# Altium PCB PC110.PcbDoc (part 4 of 24)
Units mm, origin at the board's own origin, x right, y up, seen from the top; angles counter-clockwise.
Board outline 150.05 x 107.35 mm, 10 copper layers (In2.Cu, F.Cu, B.Cu, In1.Cu, In3.Cu, In4.Cu, In5.Cu, In6.Cu, In7.Cu, In8.Cu); 936 components, 1434 nets, 4891 pads, 6088 vias.
Unrouted connection lines stored in the file: 2995.
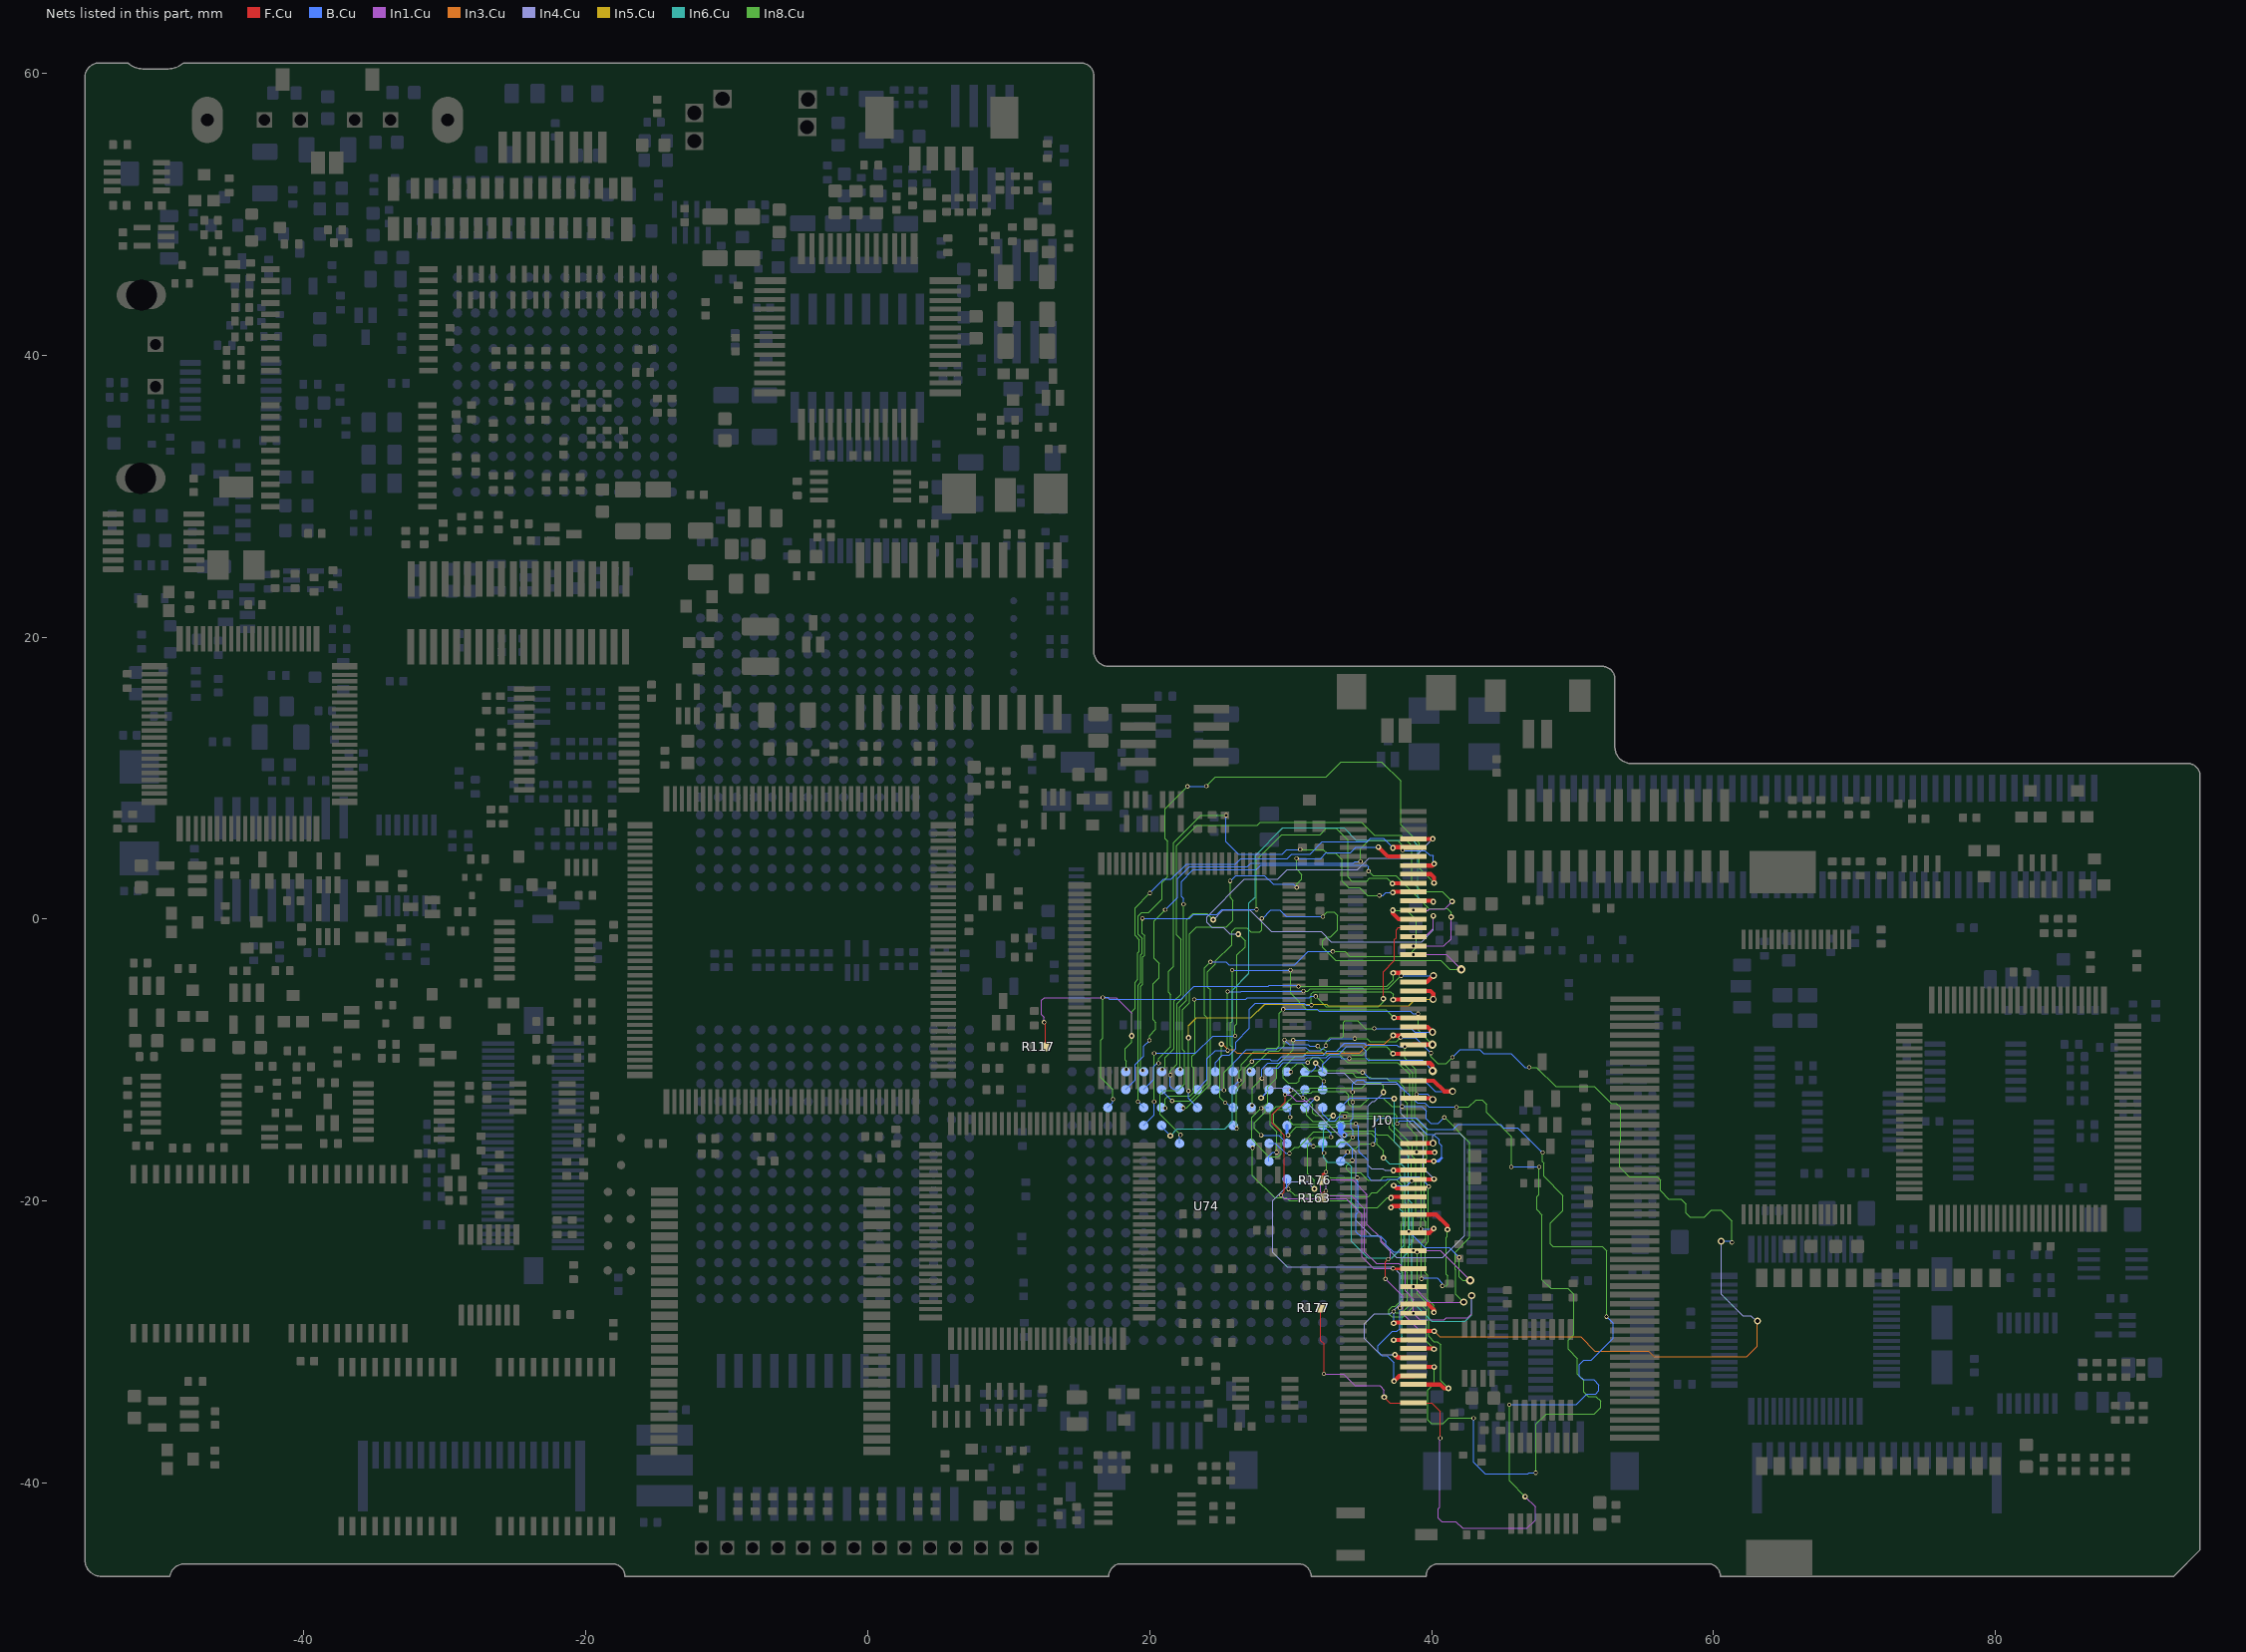
[diagram p12: the nets of this part, all layers, seen from the top]

## Footprints (in the part's own frame and the unit in brackets; to place one, negate y for a bottom-side part, rotate by r counter-clockwise, add the part's x,y. Pads: shape width x height; smd on the part's side, far side on the other; paste and mask are expansions set on the pad) (continued)
SSOP-28 [mm]
  rect 0.6x2.4 smd paste-2.4 mask+0: 1(-7.85,-5.25) 2(-6.6,-5.25) 3(-5.3,-5.25) 4(-4.05,-5.25) 5(-2.75,-5.25) 6(-1.5,-5.25) 7(-0.2,-5.25) 8(1.05,-5.25) 9(2.35,-5.25) 10(3.6,-5.25) 11(4.9,-5.25) 12(6.15,-5.25) 13(7.4,-5.25) 14(8.7,-5.25) 15(8.7,4.175) 16(7.45,4.175) 17(6.15,4.175) 18(4.9,4.175) 19(3.6,4.175) 20(2.35,4.175) 21(1.1,4.175) 22(-0.2,4.175) 23(-1.5,4.175) 24(-2.8,4.175) 25(-4.05,4.175) 26(-5.3,4.175) 27(-6.6,4.175) 28(-7.85,4.175)
  silkscreen extent -7.78,-3.48 -6.62,-2.32
Switch [mm]
  rect 1.1x1.1 hole 0.8 paste-2539.97 mask+0: 1(0.95,3.25) 2(0.95,0.25)
  rrect100% 3.5x2 hole 2.2 slot 0.8 at 90 deg paste-2539.97 mask+0: 3(-0.1,-6.25) 3(-0.05,6.75)
TestPoint_Pad_D1.5mm [mm]
  round 0.5 smd paste-0.5 mask+0: 1(0,0)
  silkscreen extent -0.95,-0.95 0.95,0.95
TSOP-5_1.65x3.05mm_P0.95mm [mm]
  rect 0.7x0.51 smd paste-0.7 mask+0: 1(1.16,-0.95) 2(1.16,0) 3(1.16,0.95) 4(-1.16,0.95) 5(-1.16,-0.95)
  silkscreen extent -0.8,-1.78 1.49,1.6
TSOT-23#1 [mm]
  rrect25% 1.22x0.65 smd paste-1.22 mask+0: 1(-1.31,0.95) 2(-1.31,-0.95) 3(1.31,0)
  silkscreen extent -2.2,-1.8 2.2,1.8
TSOT-23#2 [mm]
  rrect25% 1.22x0.65 smd paste-1.22 mask+0: 1(1.31,-0.95) 2(1.31,0.95) 3(-1.31,0)
  silkscreen extent -0.96,-1.88 1.52,1.58
TSOT-23#3 [mm]
  rect 0.7x1.4 smd paste-1.4 mask+0: 1(-0.65,0.9) 2(0,-1) 3(0.65,0.9)
TSSOP-14_4.4x5mm_P0.65mm#1 [mm]
  rrect25% 1.475x0.4 smd paste-1.475 mask+0: 1(-2.863,1.95) 2(-2.863,1.3) 3(-2.863,0.65) 4(-2.863,0) 5(-2.863,-0.65) 6(-2.863,-1.3) 7(-2.863,-1.95) 8(2.863,-1.95) 9(2.863,-1.3) 10(2.863,-0.65) 11(2.863,0) 12(2.863,0.65) 13(2.863,1.3) 14(2.863,1.95)
  silkscreen extent -3.14,-2.61 2.2,2.74
TSSOP-14_4.4x5mm_P0.65mm#2 [mm]
  rrect25% 1.475x0.4 smd paste-1.475 mask+0: 1(2.863,-1.95) 2(2.863,-1.3) 3(2.863,-0.65) 4(2.863,0) 5(2.863,0.65) 6(2.863,1.3) 7(2.863,1.95) 8(-2.863,1.95) 9(-2.863,1.3) 10(-2.863,0.65) 11(-2.863,0) 12(-2.863,-0.65) 13(-2.863,-1.3) 14(-2.863,-1.95)
  silkscreen extent -2.2,-2.74 3.14,2.61
TSSOP-16_4.4x5mm_P0.65mm [mm]
  rrect25% 1.475x0.4 smd paste-1.475 mask+0: 1(-2.863,2.275) 2(-2.863,1.625) 3(-2.863,0.975) 4(-2.863,0.325) 5(-2.863,-0.325) 6(-2.863,-0.975) 7(-2.863,-1.625) 8(-2.863,-2.275) 9(2.863,-2.275) 10(2.863,-1.625) 11(2.863,-0.975) 12(2.863,-0.325) 13(2.863,0.325) 14(2.863,0.975) 15(2.863,1.625) 16(2.863,2.275)
  silkscreen extent -4.19,-2.74 2.2,2.74
TSSOP-20_4.4x6.5mm_P0.65mm [mm]
  rrect25% 1.475x0.4 smd paste-1.475 mask+0: 1(2.863,-2.925) 2(2.863,-2.275) 3(2.863,-1.625) 4(2.863,-0.975) 5(2.863,-0.325) 6(2.863,0.325) 7(2.863,0.975) 8(2.863,1.625) 9(2.863,2.275) 10(2.863,2.925) 11(-2.863,2.925) 12(-2.863,2.275) 13(-2.863,1.625) 14(-2.863,0.975) 15(-2.863,0.325) 16(-2.863,-0.325) 17(-2.863,-0.975) 18(-2.863,-1.625) 19(-2.863,-2.275) 20(-2.863,-2.925)
  silkscreen extent -2.2,-3.38 4.19,3.38
TSSOP-24_6.1x7.8mm_P0.65mm [mm]
  rrect25% 1.475x0.4 smd paste-1.475 mask+0: 1(-3.712,3.575) 2(-3.712,2.925) 3(-3.712,2.275) 4(-3.712,1.625) 5(-3.712,0.975) 6(-3.712,0.325) 7(-3.712,-0.325) 8(-3.712,-0.975) 9(-3.712,-1.625) 10(-3.712,-2.275) 11(-3.712,-2.925) 12(-3.712,-3.575) 13(3.712,-3.575) 14(3.712,-2.925) 15(3.712,-2.275) 16(3.712,-1.625) 17(3.712,-0.975) 18(3.712,-0.325) 19(3.712,0.325) 20(3.712,0.975) 21(3.712,1.625) 22(3.712,2.275) 23(3.712,2.925) 24(3.712,3.575)
  silkscreen extent -5.04,-4.04 3.05,4.04
TSSOP-30_6.1x9.7mm_P0.65mm [mm]
  rrect25% 1.475x0.4 smd paste-1.475 mask+0: 1(3.712,-4.55) 2(3.712,-3.9) 3(3.712,-3.25) 4(3.712,-2.6) 5(3.712,-1.95) 6(3.712,-1.3) 7(3.712,-0.65) 8(3.712,0) 9(3.712,0.65) 10(3.712,1.3) 11(3.712,1.95) 12(3.712,2.6) 13(3.712,3.25) 14(3.712,3.9) 15(3.712,4.55) 16(-3.712,4.55) 17(-3.712,3.9) 18(-3.712,3.25) 19(-3.712,2.6) 20(-3.712,1.95) 21(-3.712,1.3) 22(-3.712,0.65) 23(-3.712,0) 24(-3.712,-0.65) 25(-3.712,-1.3) 26(-3.712,-1.95) 27(-3.712,-2.6) 28(-3.712,-3.25) 29(-3.712,-3.9) 30(-3.712,-4.55)
  silkscreen extent -3.05,-5.01 5.04,5.01
XTAL-1 [mm]
  rect 2.4x2.8 smd paste-2.8 mask+0: 1(-3.25,0.1) 2(3.25,0.1)
  rect 1.5x2.4 smd paste-2.4 mask-2.4: 3(0.05,0)
  F.Cu region: 4.05,1.8 1.7,1.8 1.7,-1.65 4.05,-1.65 4.05,-2.2 -4.05,-2.2 -4.05,-1.65 -1.7,-1.65 -1.7,1.8 -4.05,1.8 -4.05,2.4 4.05,2.4
XTAL-2 [mm]
  rect 1.5x2.1 smd paste-2.1 mask+0: 1(1.3,-5.55) 2(-1.25,-5.55)
  rect 2.4x1.5 smd paste-2.4 mask-2.4: 3(0.05,0)
  F.Cu region: 1.4,-3.45 1.2,-3.45 1.2,-4.15 0.2,-4.15 0.2,-6.5 -0.15,-6.5 -0.15,-4.15 -1.1,-4.15 -1.1,-3.5 -1.3,-3.5 -1.3,6.75 1.4,6.75
XTAL-3 [mm]
  rect 2x1.4 smd paste-2 mask+0: 1(-1.45,-2.75) 2(-1.45,2.75) 3(1.45,2.75) 4(1.45,-2.75)
  rect 2.4x1.5 smd paste-2.4 mask-2.4: 5(0,0)
  F.Cu region: -1.55,3.8 -0.1,3.8 -0.1,1.7 -1.5,1.7 -1.5,-1.7 -0.1,-1.7 -0.1,-3.8 -1.5,-3.8 -1.5,-3.95 1.55,-3.95 1.55,-3.8 0.1,-3.8 0.1,-1.7 1.5,-1.7 1.5,1.7 0.1,1.7 0.1,3.8 1.55,3.8 1.55,3.9 -1.55,3.9
XTAL-4 [mm]
  rect 4x1.5 smd paste-4 mask+0: 1(0.15,-2.2) 2(0.15,2.1) 3(0.15,-0.08)
XTAL-5 [mm]
  rect 1.5x2.4 smd paste-2.4 mask+0: 1(0,3.2) 2(0,-3.4)
  rect 1.5x2.4 smd paste-2.4 mask-2.4: 3(0,0)
  F.Cu region: 1.15,1.65 -1.15,1.65 -1.15,3.3 -1.3,3.3 -1.3,-3.5 -1.1,-3.5 -1.1,-1.85 1.1,-1.85 1.1,-3.5 1.3,-3.5 1.3,3.35 1.15,3.35
XTAL-6 [mm]
  rect 2.4x2.8 smd paste-2.8 mask+0: 1(3.25,-0.1) 2(-3.25,-0.1)
  rect 1.5x2.4 smd paste-2.4 mask-2.4: 3(-0.05,0)
  F.Cu region: -4.05,1.65 -1.7,1.65 -1.7,-1.8 -1.725,-1.8 -1.725,-2.4 1.7,-2.4 1.7,-1.8 1.7,1.65 4.05,1.65 4.05,2.2 -4.05,2.2

## Part data
C1 C2 C3 C4 C5 C6 C7 C8 C15 C16 C17 C19 C20 C24 C26 C27 C28 C29 C31 C32 C33 C34 C35 C37 C38 C39 C40 C41 C42 C43 C44 C48 C50 C52 C53 C55 C56 C58 C61 C62 C64 C65 C67 C68 C69 C70 C71 C72 C73 C74 C75 C76 C77 C78 C81 C82 C83 C84 C85 C86 C87 C88 C90 C91 C92 C93 C94 C95 C96 C97 C98 C99 C101 C102 C103 C104 C105 C106 C107 C108 C109 C110 C111 C112 C113 C114 C115 C116 C117 C119 C120 C121 C122 C123 C125 C126 C127 C128 C129 C133 C136 C137 C138 C139 C141 C142 C143 C144 C145 C146 C148 C149 C151 C154 C155 C156 C157 C159 C163 C165 C167 C169 C170 C171 C172 C173 C174 C175 C177 C178 C179 C180 C181 C182 C183 C184 C185 C186 C187 C188 C189 C191 C192 C193 C194 C195 C196 C198 C199 C203 C205 C208 C211 C212 C213 C215 C216 C217 C219 C220 C223 C227 C228 C230 C231 C234 C235 C236 C237 C239 C241 C242 C243 C244 C247 C249 C250 C251 C252 C253 C254 C255 C256 C257 C258 C260 C261 C263 C264 C265 C266 C267 C268 C269 C270 C271 C272 C274 C275 C276 C278 C279 C280 C281 C282 C283: library part C_0402_1005Metric, "Capacitor SMD 0402 (1005 Metric), square (rectangular) end terminal, IPC_7351 nominal, (Body size source: IPC-SM-782 page 76, https://www.pcb-3d.com/wordpress/wp-content/uploads/ipc-sm-782a_amendment_1_and_2.pdf), generated with kicad-footprint-generator"
  C6 C8 C16 C19 C27 C28 C35 C44 C50 C52 C53 C55 C56 C58 C61 C62 C68 C69 C70 C71 C74 C76 C78 C82 C94 C96 C97 C98 C99 C102 C103 C104 C105 C106 C107 C111 C112 C114 C115 C116 C117 C119 C121 C122 C123 C125 C127 C128 C133 C137 C138 C139 C141 C142 C143 C144 C145 C146 C148 C149 C151 C155 C157 C159 C165 C203 C205 C208 C211 C212 C213 C215 C216 C217 C219 C220 C223 C231 C236 C241 C244 C247 C250 C251 C252 C253 C255 C263 C266 C267 C269 C271 C274 C275 C276 C280: ki_fp_filters=C_*
  C270: ki_fp_filters=R_*
C9 C10 C14 C23 C30 C36 C47 C51 C152 C160 C161 C162 C200 C201 C204 C206 C209 C210 C214 C232: library part C_1206_3216Metric, "Capacitor SMD 1206 (3216 Metric), square (rectangular) end terminal, IPC_7351 nominal, (Body size source: IPC-SM-782 page 76, https://www.pcb-3d.com/wordpress/wp-content/uploads/ipc-sm-782a_amendment_1_and_2.pdf), generated with kicad-footprint-generator"
  C9 C14 C152 C161 C204 C209 C214: ki_fp_filters=C_*
C11 C12 C13 C18 C21 C22 C25 C45 C46 C57 C59 C60 C63 C66 C79 C80 C89 C100 C124 C130 C131 C132 C134 C140 C147 C150 C153 C158 C164 C166 C168 C176 C190 C197 C202 C207 C218 C221 C222 C224 C225 C226 C229 C233 C238 C240 C245 C246 C248 C259 C273 C277: library part C_0603_1608Metric, "Capacitor SMD 0603 (1608 Metric), square (rectangular) end terminal, IPC_7351 nominal, (Body size source: IPC-SM-782 page 76, https://www.pcb-3d.com/wordpress/wp-content/uploads/ipc-sm-782a_amendment_1_and_2.pdf), generated with kicad-footprint-generator"
  C57 C59 C60 C63 C66 C79 C80 C100 C130 C131 C132 C134 C140 C153 C158 C164 C248 C277: ki_fp_filters=C_*
C49 C54 C118 C135 C262: library part C_0805_2012Metric, "Capacitor SMD 0805 (2012 Metric), square (rectangular) end terminal, IPC_7351 nominal, (Body size source: IPC-SM-782 page 76, https://www.pcb-3d.com/wordpress/wp-content/uploads/ipc-sm-782a_amendment_1_and_2.pdf, https://docs.google.com/spreadsheets/d/1BsfQQcO9C6DZCsRaXUlFlo91Tg2WpOkGARC1WS5S8t0/edit?usp=sharing), generated with kicad-footprint-generator"
  C54 C262: ki_fp_filters=C_*
D1 D3 D5 D6 D7 D8 D9 D11 D12 D16 D18 D21 D22 D24 D25 D26 D27 D28 D29 D34 D35 Q8 Q17: library part 3D
  D6 D7: ki_fp_filters="TO-???* *_Diode_* *SingleDiode* D_*"
D2 D4 D10 D13 D14 D15 D17 D19 D20 D30 D31 D32 D37 D40 D42 D43 D45 D46 D49 D58 D59 Q4 Q5 Q6 Q22: library part SOT-416L
D23 D36 D38 D41 D44 D47 D48 D50 D51: library part D_0603_1608Metric, "Diode SMD 0603 (1608 Metric), square (rectangular) end terminal, IPC_7351 nominal, (Body size source: http://www.tortai-tech.com/upload/download/2011102023233369053.pdf), generated with kicad-footprint-generator", ki_fp_filters="TO-???* *_Diode_* *SingleDiode* D_*"
D33 D52 D53 D54 D56 D57 Q2 Q7 Q10 Q12 Q14 Q15 Q18 Q19 Q21 Q23 Q26 Q27 Q28 Q30 Q32 Q38: library part SOT-416, "SOT-416, https://www.nxp.com/docs/en/package-information/SOT416.pdf"
  D52 D53 D54 D56 D57: ki_fp_filters=SOT?323*
  Q2 Q7 Q10 Q12 Q14 Q18 Q19 Q26 Q27 Q38: ki_fp_filters=SOT?23*
D39 D55: library part Diode, ki_fp_filters="TO-???* *_Diode_* *SingleDiode* D_*"
D60: library part SOT-23, "SOT, 3 Pin (JEDEC TO-236 Var AB https://www.jedec.org/document_search?search_api_views_fulltext=TO-236), generated with kicad-footprint-generator ipc_gullwing_generator.py"
EM1 EM2 EM3 EM4 EM5 RA1 RA2 RA3 RA4 RA5: library part R-array
  RA1 RA2 RA3 RA4 RA5: ki_fp_filters="DIP* SOIC* R*Array*Concave* R*Array*Convex* MSOP*"
F1 F2 F3 F4: library part Fuse_1206_3216Metric, "Fuse SMD 1206 (3216 Metric), square (rectangular) end terminal, IPC_7351 nominal, (Body size source: http://www.tortai-tech.com/upload/download/2011102023233369053.pdf), generated with kicad-footprint-generator", ki_fp_filters=*Fuse*
G1: library part logo
J1: library part PS2
J2: library part LCD_connector, ki_fp_filters=Connector*:*_1x??_*
J3: library part Audio-Jack, ki_fp_filters=Jack*
J4: library part connector-4, ki_fp_filters=Connector*:*_1x??_*
J5: library part PSU_Connector, ki_fp_filters=Connector*:*_2x??_*
J6: library part BridgeBatt, ki_fp_filters=Connector*:*_1x??_*
J7: library part SPKR, ki_fp_filters=Connector*:*_1x??_*
J8: library part Modem-Connector
J9: library part Debug-10
J10: library part PCMCIA
J11: library part CF-card
J12: library part Debug-6
J13: library part "Docking Port"
J14: library part TestPoint_Pad_D1.5mm, "SMD pad as test Point, diameter 1.5mm"
J15: library part "RAM Module"
J16: library part Flat-20, ki_fp_filters=Connector*:*_1x??_*
J17: library part Flat-8, ki_fp_filters=Connector*:*_1x??_*
J18: library part Flat-4, ki_fp_filters=Connector*:*_1x??_*
J19: library part Flat-18, ki_fp_filters=Connector*:*_1x??_*
L1 L2 L3 L5 L6 L7 L8 L11 L13 L14 L15 L16 L17 L18: library part L_0603_1608Metric, "Inductor SMD 0603 (1608 Metric), square (rectangular) end terminal, IPC_7351 nominal, (Body size source: http://www.tortai-tech.com/upload/download/2011102023233369053.pdf), generated with kicad-footprint-generator"
  L1: ki_fp_filters="Choke_* *Coil* Inductor_* L_*"
L4: library part L_1210_3225Metric, "Inductor SMD 1210 (3225 Metric), square (rectangular) end terminal, IPC_7351 nominal, (Body size source: http://www.tortai-tech.com/upload/download/2011102023233369053.pdf), Alternate KiCad Library", ki_fp_filters="Choke_* *Coil* Inductor_* L_*"
L9 L10 L12: library part L_0805_2012Metric, "Inductor SMD 0805 (2012 Metric), square (rectangular) end terminal, IPC_7351 nominal, (Body size source: IPC-SM-782 page 80, https://www.pcb-3d.com/wordpress/wp-content/uploads/ipc-sm-782a_amendment_1_and_2.pdf), generated with kicad-footprint-generator"
  L12: ki_fp_filters="Choke_* *Coil* Inductor_* L_*"
Q1 Q11 Q13 Q24 Q29 Q31: library part SOT-23, "SOT-23, Standard, Alternate KiCad Library"
  Q11 Q13: ki_fp_filters=SOT?23*
  Q24 Q31: ki_fp_filters="SOT?23* SC?59*"
  Q29: ki_fp_filters="SOT* SC*"
Q3 Q25 Q33 Q34 Q37: library part SOT-89-3, "SOT-89-3, http://ww1.microchip.com/downloads/en/DeviceDoc/3L_SOT-89_MB_C04-029C.pdf"
  Q3: ki_fp_filters=TO?92*
Q9 Q35 Q43 Q44: library part SOT-523, "SOT523, https://www.diodes.com/assets/Package-Files/SOT523.pdf", ki_fp_filters=SOT?23*
Q16: library part TSOT-23, "3-pin TSOT23 package, http://www.analog.com.tw/pdf/All_In_One.pdf, Alternate KiCad Library"
Q20 Q36: library part TSOT-23, "3-pin TSOT23 package, http://www.analog.com.tw/pdf/All_In_One.pdf"
Q39 Q40 Q41 Q42: library part TSOT-23
R1 R2 R3 R4 R5 R6 R7 R8 R9 R10 R11 R12 R13 R14 R15 R16 R17 R18 R19 R20 R21 R22 R23 R24 R25 R26 R27 R29 R30 R31 R32 R33 R34 R35 R36 R37 R38 R39 R40 R41 R42 R43 R44 R45 R46 R47 R48 R49 R50 R51 R52 R53 R54 R55 R56 R57 R58 R59 R60 R61 R62 R63 R64 R65 R66 R67 R69 R70 R71 R72 R73 R74 R75 R76 R77 R78 R79 R80 R81 R82 R83 R84 R85 R86 R87 R88 R89 R90 R91 R92 R93 R94 R95 R96 R97 R98 R99 R100 R101 R102 R103 R104 R105 R106 R107 R108 R109 R110 R112 R113 R114 R115 R116 R117 R118 R119 R120 R121 R122 R123 R124 R125 R126 R127 R128 R129 R130 R131 R132 R133 R134 R135 R136 R137 R138 R139 R140 R141 R142 R143 R144 R145 R146 R147 R148 R149 R150 R151 R152 R153 R154 R155 R156 R157 R158 R159 R160 R161 R162 R163 R164 R165 R166 R167 R168 R169 R170 R171 R172 R173 R174 R175 R176 R177 R178 R179 R180 R181 R182 R183 R184 R185 R186 R187 R188 R189 R190 R191 R192 R193 R194 R195 R196 R197 R198 R199 R200 R201 R202 R203 R204 R205 R206 R207 R208 R209 R210 R211 R212 R213 R214 R215 R216 R217 R218 R219 R220 R221 R222 R223 R224 R225 R227 R228 R229 R232 R233 R234 R235 R236 R237 R240 R242 R252 R253 R255 R258 R259 R260 R261 R262 R263 R265 R266 R268 R269 R270 R271 R272 R274 R275 R276 R277 R278 R279 R280 R281 R282 R283 R285 R286 R287 R288 R314 R316 R317 R318 R319 R320 R321 R322 R323 R324 R326 R327 R328 R329 R330 R331 R332 R333 R334 R335 R336 R337 R338 R339 R340 R341 R342 R343 R344 R345 R346 R347 R348 R349 R350 R351 R352 R353 R354 R355 R356 R357 R358 R359 R400 R401 R402 R403 R404 R405 R406: library part R_0402_1005Metric, "Resistor SMD 0402 (1005 Metric), square (rectangular) end terminal, IPC_7351 nominal, (Body size source: IPC-SM-782 page 72, https://www.pcb-3d.com/wordpress/wp-content/uploads/ipc-sm-782a_amendment_1_and_2.pdf), Alternate KiCad Library", ki_fp_filters=R_*
  R70: Description="External clock input for Audio Drive"
R28 R226: library part R_1206_3216Metric, "Resistor SMD 1206 (3216 Metric), square (rectangular) end terminal, IPC_7351 nominal, (Body size source: IPC-SM-782 page 72, https://www.pcb-3d.com/wordpress/wp-content/uploads/ipc-sm-782a_amendment_1_and_2.pdf), Alternate KiCad Library", ki_fp_filters=R_*
R68 R292 R300 R313: library part R_0805_2012Metric, "Resistor SMD 0805 (2012 Metric), square (rectangular) end terminal, IPC_7351 nominal, (Body size source: IPC-SM-782 page 72, https://www.pcb-3d.com/wordpress/wp-content/uploads/ipc-sm-782a_amendment_1_and_2.pdf), generated with kicad-footprint-generator", ki_fp_filters=R_*
R111 R231 R239: library part R_0603_1608Metric, "Resistor SMD 0603 (1608 Metric), square (rectangular) end terminal, IPC_7351 nominal, (Body size source: IPC-SM-782 page 72, https://www.pcb-3d.com/wordpress/wp-content/uploads/ipc-sm-782a_amendment_1_and_2.pdf), Alternate KiCad Library", ki_fp_filters=R_*
R230 R250 R256 R264 R267 R273 R284: library part R_0805_2012Metric, "Resistor SMD 0805 (2012 Metric), square (rectangular) end terminal, IPC_7351 nominal, (Body size source: IPC-SM-782 page 72, https://www.pcb-3d.com/wordpress/wp-content/uploads/ipc-sm-782a_amendment_1_and_2.pdf), Alternate KiCad Library", ki_fp_filters=R_*
R238: library part R_0603_1608Metric, "Resistor SMD 0603 (1608 Metric), square (rectangular) end terminal, IPC_7351 nominal, (Body size source: IPC-SM-782 page 72, https://www.pcb-3d.com/wordpress/wp-content/uploads/ipc-sm-782a_amendment_1_and_2.pdf), generated with kicad-footprint-generator", ki_fp_filters=R_*
R241: library part R_1206_3216Metric_Pad1.30x1.75mm_HandSolder, "Resistor SMD 1206 (3216 Metric), square (rectangular) end terminal, IPC_7351 nominal with elongated pad for handsoldering. (Body size source: IPC-SM-782 page 72, https://www.pcb-3d.com/wordpress/wp-content/uploads/ipc-sm-782a_amendment_1_and_2.pdf), generated with kicad-footprint-generator", ki_fp_filters=R_*
R243 R244 R245 R246 R247 R248 R249 R251 R254 R257 R289 R290 R291 R293 R294 R295 R296 R297 R298 R299 R301 R302 R303 R304 R305 R306 R307 R308 R309 R310 R311 R312 R315 R325 R360 R361 R362 R363 R364 R365 R366 R367 R368 R369 R370 R371 R372 R373 R374 R375 R376 R377 R378 R379 R380 R381 R382 R383 R384 R385 R386 R387 R388 R389 R390 R391 R392 R393 R394 R395 R396 R397 R398 R399 R407 R408 R409 R410 R411 R412 R413: library part R_0402_1005Metric, "Resistor SMD 0402 (1005 Metric), square (rectangular) end terminal, IPC_7351 nominal, (Body size source: IPC-SM-782 page 72, https://www.pcb-3d.com/wordpress/wp-content/uploads/ipc-sm-782a_amendment_1_and_2.pdf), generated with kicad-footprint-generator", ki_fp_filters=R_*
SW1: library part Switch
SW2: library part LidSwitch
U1 U9 U14 U15 U23 U24 U25 U29 U37 U52 U58 U60 U65: library part SOT-353, "SOT-353, SC-70-5"
  U1 U14 U15 U23 U52 U58: ki_fp_filters="SOT?23* SOT?553*"
  U9 U25 U37 U65: ki_fp_filters="SOT* SG-*"
  U24 U60: ki_fp_filters="SOT?23* Texas?R-PDSO-G5?DCK* Texas?R-PDSO-N5?DRL* Texas?X2SON*0.8x0.8mm*P0.48mm*"
  U29: ki_fp_filters=SOT?23*
U2 U19 U20 U26 U38 U39: library part sso-8
  U2 U20 U26 U38 U39: ki_fp_filters="SSOP* VSSOP*"
  U19: ki_fp_filters=VSSOP*
U3: library part IRDA
U4: library part QFN-52
U5 U18 U30 U32 U34 U40 U54 U56 U57 U62 U64 U66 U68 U71: library part TSSOP-14_4.4x5mm_P0.65mm, "TSSOP, 14 Pin (JEDEC MO-153 Var AB-1 https://www.jedec.org/document_search?search_api_views_fulltext=MO-153), generated with kicad-footprint-generator ipc_gullwing_generator.py"
  U5 U18 U30 U32 U34 U40 U68: ki_fp_filters=DIP*W7.62mm*
  U54: Datasheet=https://github.com/ahmadexp/PC110-Mainboard-Schematic/blob/main/datasheets/bottom/b-v74.pdf, Description="Dual D-Type Positive-Edge-Triggered Flip-Flops With Clear and Preset", ki_fp_filters=DIP*W7.62mm*
  U56: ki_fp_filters=DIP?14*
  U57 U62: Datasheet=https://github.com/ahmadexp/PC110-Mainboard-Schematic/blob/main/datasheets/bottom/a%26e-V125.pdf, Description="ABT QUADRUPLE BUS BUFFER WITH 3STATE OUTPUTS", ki_fp_filters=DIP*W7.62mm*
  U64: Datasheet=https://github.com/ahmadexp/PC110-Mainboard-Schematic/blob/main/datasheets/bottom/g-V126.pdf, Description="Quadruple Bus Buffer Gates With 3-State Outputs", ki_fp_filters=DIP*W7.62mm*
  U66: Datasheet=https://github.com/ahmadexp/PC110-Mainboard-Schematic/blob/main/datasheets/bottom/f-V02.pdf, Description="Quadruple 2-Input Positive-NOR Gates", ki_fp_filters="SO14* DIP*W7.62mm*"
  U71: Datasheet=https://github.com/ahmadexp/PC110-Mainboard-Schematic/blob/main/datasheets/bottom/d-V32.pdf, Description="Quadruple 2-Input Positive-Or Gates", ki_fp_filters=DIP?14*
U6: library part QFN-80
U7: library part TSSOP-24_6.1x7.8mm_P0.65mm, "TSSOP, 24 Pin (JEDEC MO-153 Var DA https://www.jedec.org/document_search?search_api_views_fulltext=MO-153), generated with kicad-footprint-generator ipc_gullwing_generator.py"
U8: library part GRAMchip
U10: library part SOP-24
U11 U44: library part soic-8-small, ki_fp_filters="SOIC*3.9x4.9mm*P1.27mm* DIP*W7.62mm* TO*99* OnSemi*Micro8* TSSOP*3x3mm*P0.65mm* TSSOP*4.4x3mm*P0.65mm* MSOP*3x3mm*P0.65mm* SSOP*3.9x4.9mm*P0.635mm* LFCSP*2x2mm*P0.5mm* *SIP* SOIC*5.3x6.2mm*P1.27mm*"
U12: library part SOIC-8-narrow, Datasheet=https://github.com/ahmadexp/Open-Source-PC110/blob/main/datasheets/top/6-LM4861.pdf, Description="Audio Amp", ki_fp_filters="MSOP*3x3mm*P0.65mm* SOIC*3.9x4.9mm*P1.27mm*"
U13 U16 U17 U31 U50: library part SOT-23-5, "SOT, 5 Pin (JEDEC MO-178 Var AA https://www.jedec.org/document_search?search_api_views_fulltext=MO-178), generated with kicad-footprint-generator ipc_gullwing_generator.py"
U21: library part Bowman
U22: library part FDC
U27: library part Flash-32
U28 U33: library part RAMchip
U35: library part Pluto
U36: library part SOP48
U41: library part SanDisk
U42: library part QFN-100
U43: library part LCD, ki_fp_filters=Connector*:*_1x??_*
U45: library part TSSOP-16_4.4x5mm_P0.65mm, "TSSOP, 16 Pin (https://www.jedec.org/document_search?search_api_views_fulltext=MO-153), generated with kicad-footprint-generator ipc_gullwing_generator.py", ki_fp_filters=DIP?16*
U46: library part SOP-16, "SOP, 16 Pin (https://toshiba.semicon-storage.com/info/docget.jsp?did=12855&prodName=TLP290-4), generated with kicad-footprint-generator ipc_gullwing_generator.py"
U47 U48: library part SOIC-8, "SOIC, 8 Pin (JEDEC MS-012AA, https://www.analog.com/media/en/package-pcb-resources/package/pkg_pdf/soic_narrow-r/r_8.pdf), generated with kicad-footprint-generator ipc_gullwing_generator.py"
  U47: ki_fp_filters="SOIC*3.9x4.9mm*P1.27mm* DIP*W7.62mm* MSOP*3x3mm*P0.65mm* SSOP*2.95x2.8mm*P0.65mm* TSSOP*3x3mm*P0.65mm* VSSOP*P0.5mm* TO?99*"
  U48: Description="Digital Rheostat"
U49 U72: library part SSOP-24_5.3x8.2mm_P0.65mm, "24-Lead Plastic Shrink Small Outline (SS)-5.30 mm Body [SSOP] (see Microchip Packaging Specification 00000049BS.pdf)", Datasheet=https://github.com/ahmadexp/PC110-Mainboard-Schematic/blob/main/datasheets/bottom/8-HD151015.pdf, Description="9 bit Level Shifter/Transceiver With 3 State Outputs"
U51: library part BGA-169
U53 U55: library part TSOP-5_1.65x3.05mm_P0.95mm, "TSOP-5 package (comparable to TSOT-23), https://www.vishay.com/docs/71200/71200.pdf"
U59: library part Flash-40
U61 U74 U76: library part BGA-256
  U76: Datasheet=http://github.com/ahmadexp/PC110-Mainboard-Schematic/blob/main/datasheets/bottom/4-486SX-33.pdf, Description="Intel 486 SX"
U63: library part SOIC-16W, "SOIC, 16 Pin (http://www.ti.com/lit/ml/msop002a/msop002a.pdf), generated with kicad-footprint-generator ipc_gullwing_generator.py"
U67: library part QFN64, Description="Keyboard controller"
U69: library part SSOP-8_2.95x2.8mm_P0.65mm, "SSOP-8 2.9 x2.8mm Pitch 0.65mm", Datasheet=https://github.com/ahmadexp/PC110-Mainboard-Schematic/blob/main/datasheets/bottom/h-7W32.pdf, Description="Dual 2-Input Positive-OR Gate", ki_fp_filters="SSOP* VSSOP*"
U70: library part TSSOP-30_6.1x9.7mm_P0.65mm, "TSSOP, 30 Pin (JEDEC MO-153 Var DB-1 https://www.jedec.org/document_search?search_api_views_fulltext=MO-153), generated with kicad-footprint-generator ipc_gullwing_generator.py", Datasheet=https://github.com/ahmadexp/PC110-Mainboard-Schematic/blob/main/datasheets/bottom/12-TPS2201.PDF, Description="Dual-Slot PC Card Power-Interface Switches"
U73: library part TSSOP-20_4.4x6.5mm_P0.65mm, "TSSOP, 20 Pin (JEDEC MO-153 Var AC https://www.jedec.org/document_search?search_api_views_fulltext=MO-153), generated with kicad-footprint-generator ipc_gullwing_generator.py", Datasheet=https://github.com/ahmadexp/PC110-Mainboard-Schematic/blob/main/datasheets/bottom/c-V244.pdf, Description="ABT OCTAL BUFFER/DRIVER", ki_fp_filters=DIP?20*
U75: library part SSOP-28, Description="Trackpad Controller"
X1: library part XTAL-2
X2: library part XTAL-1, ki_fp_filters=Crystal*
X3: library part XTAL-3, ki_fp_filters=Crystal*
X4: library part XTAL-6, ki_fp_filters=Crystal*
X5: library part XTAL-5, ki_fp_filters=Crystal*
X6: library part XTAL-4, ki_fp_filters=Crystal*

## Via types
v1: diameter 0.3, hole 0.2, B.Cu to In8.Cu, tented both sides, 1934 vias
v2: diameter 0.4, hole 0.2, F.Cu to B.Cu, tented both sides, 1902 vias
v3: diameter 0.3, hole 0.2, F.Cu to In1.Cu, tented both sides, 1729 vias
v4: diameter 0.6, hole 0.3, F.Cu to B.Cu, tented both sides, 354 vias
v5: diameter 0.5, hole 0.3, F.Cu to B.Cu, tented both sides, 136 vias
v6: diameter 0.4, hole 0.2, B.Cu to In8.Cu, tented both sides, 12 vias
v7: diameter 0.3, hole 0.2, F.Cu to B.Cu, tented both sides, 6 vias
v8: diameter 0.6, hole 0.2, F.Cu to B.Cu, tented both sides, 4 vias
v9: diameter 0.5, hole 0.2, B.Cu to In8.Cu, tented both sides, 3 vias
v10: diameter 0.5, hole 0.2, F.Cu to B.Cu, tented both sides, 2 vias
v11: diameter 0.4, hole 0.3, F.Cu to B.Cu, tented both sides, 2 vias
v12: diameter 0.3, hole 0.2, F.Cu to In4.Cu, tented both sides, 2 vias
v13: diameter 0.6, hole 0.3, B.Cu to In8.Cu, tented both sides, 1 vias
v14: diameter 0.3, hole 0.2, F.Cu to In3.Cu, tented both sides, 1 vias

## Nets (pads, with @x,y where several pads share a name; then routed paths per layer and width w, separated by ;. In a path a pad name is that pad's centre, name@x,y a point inside that pad or via, vN(x,y) a via of type N, cw(c..) or ccw(c..) an arc to the next point about the centre after c; other vN are vias at no path point)
A5VDET: J10.19 U74.P3 | length 31.6
  F.Cu w0.3: v2(37.27,-3.81) 37.28,-3.8 J10.19@38.7,-3.8
  In8.Cu w0.08: v1(16.67,-5.55) 16.68,-5.56 16.68,-8.42 16.53,-8.57 16.53,-11.22 17.39,-12.08 v1(17.39,-12.77) ; v1(30.56,-4.78) 30.59,-4.75 36.81,-4.75 37.27,-4.29 v2(37.27,-3.81)
  B.Cu w0.08: v1(16.67,-5.55) 17.03,-5.55 17.15,-5.67 22.23,-5.67 23.14,-4.76 28.42,-4.76 28.48,-4.7 30.48,-4.7 v1(30.56,-4.78) ; U74.P3@17.03,-13.37 17.03,-13.34 17.38,-12.99 17.38,-12.78 v1(17.39,-12.77)
ABVD1: J10.59 R163.2 U74.M13 | length 105.6
  F.Cu w0.08: v3(36.72,-25.51) 36.72,-24.3 v3(36.91,-24.11)
  F.Cu w0.2: R163.2@32.21,-19.77 32.21,-19.56 32.49,-19.28 v3(32.5,-19.28)
  F.Cu w0.3: J10.59@38.7,-29.2 40.16,-29.2 v2(40.18,-29.22)
  In1.Cu w0.08: v3(32.5,-19.28) 32.5,-18.67 32.68,-18.49 34.39,-18.49 35.43,-19.53 35.43,-21.64 36.43,-22.64 36.43,-22.81 37.08,-23.46 37.08,-23.94 v3(36.91,-24.11) ; v3(36.72,-25.51) 37.96,-26.75 37.96,-27.97 39.21,-29.22 v2(40.18,-29.22)
  In3.Cu w0.08: v2(40.18,-29.22) 40.58,-29.62 50.57,-29.62 51.57,-30.62 55.38,-30.62 55.78,-31.02 62.36,-31.02 63.11,-30.27 v5(63.11,-28.49)
  In4.Cu w0.08: v5(60.54,-22.84) 60.54,-26.61 62.06,-28.13 62.65,-28.13 63.01,-28.49 v5(63.11,-28.49)
  In8.Cu w0.08: v1(27.91,-15.32) 27.44,-14.85 27.44,-14.44 28.2,-13.68 28.2,-13.2 28.36,-13.04 28.36,-11.89 29,-11.25 29,-10.41 30.18,-9.23 v1(30.18,-8.57) ; v1(34.54,-8.47) 35.4,-8.47 35.62,-8.69 37.49,-8.69 v1(37.79,-8.39) ; v1(39.95,-9.49) 39.95,-9.74 40.44,-10.23 41.04,-10.23 v1(41.48,-9.79) ; v1(46.92,-10.51) 47.43,-10.51 48.8,-11.88 51.55,-11.88 52.72,-13.05 53.09,-13.05 53.4,-13.36 53.4,-15.77 53.34,-15.83 53.34,-17.58 54.01,-18.25 55.98,-18.25 56.235,-18.505 56.235,-19.265 56.82,-19.85 57.7,-19.85 58.05,-20.2 58.05,-20.85 58.32,-21.12 59.36,-21.12 59.85,-20.63 60.53,-20.63 61.3,-21.4 v1(61.3,-22.93)
  B.Cu w0.08: v1(27.91,-15.32) 29.17,-15.32 U74.M13@29.73,-15.88 ; v1(30.18,-8.57) 31.2,-8.57 31.25,-8.62 32.71,-8.62 32.86,-8.47 v1(34.54,-8.47) ; v1(37.79,-8.39) 38.85,-8.39 v1(39.95,-9.49) ; v1(41.48,-9.79) 42.04,-9.23 43.34,-9.23 43.37,-9.26 43.41,-9.26 43.69,-9.54 45.64,-9.54 46.61,-10.51 v1(46.92,-10.51) ; v5(60.54,-22.84) 61.21,-22.84 v1(61.3,-22.93)
ABVD2: J10.57 R176.2 U74.P16 | length 46.8
  F.Cu w0.2: R176.2@32.23,-18.51 32.23,-18.19 v3(32.5,-17.92)
  In1.Cu w0.08: v3(32.5,-17.92) 32.5,-18.05 32.13,-18.42 32.13,-19.35 32.38,-19.6 34.3,-19.6 35.25,-20.55 35.25,-23.59 36.09,-24.43 37.69,-24.43 38.12,-24.86 38.12,-26.37 38.7,-26.95 v3(38.7,-27.95) 39.15,-28.4 40.88,-28.4 41.02,-28.26 42.57,-28.26 42.84,-27.99 v5(42.84,-26.7)
  In6.Cu w0.08: v2(37.34,-12.73) 37.34,-15.78 38.36,-16.8 38.36,-19.89 38.6,-20.13 38.6,-27.1 40,-28.5 42.39,-28.5 42.83,-28.06 42.83,-26.71 v5(42.84,-26.7)
  B.Cu w0.08: U74.P16@33.54,-13.34 34.2,-12.68 37.29,-12.68 v2(37.34,-12.73)
ACA0: J10.58 U74.P15 | length 23.8
  F.Cu w0.3: v2(37.31,-28.66) 37.37,-28.6 J10.58@38.7,-28.6
  In8.Cu w0.08: v1(33.84,-14) 34.04,-14 34.09,-13.95 36.97,-13.95 37.23,-14.21 37.23,-14.62 38.64,-16.03 38.64,-16.81 38.89,-17.06 38.89,-20.92 38.71,-21.1 38.71,-22.87 38.36,-23.22 38.36,-24.84 38.58,-25.06 38.58,-27.225 37.875,-27.93 37.42,-27.93 v1(37.31,-27.82)
  B.Cu w0.08: U74.P15@32.27,-13.34 32.27,-13.82 32.76,-14.31 33.14,-14.31 33.45,-14 v1(33.84,-14) ; v2(37.31,-28.66) v1(37.31,-27.82)
ACA1: J10.56 U74.N13 | length 25.9
  F.Cu w0.3: J10.56@38.7,-27.3 39.75,-27.3 40.16,-27.71 v2(40.16,-27.89)
  In8.Cu w0.08: v1(29.82,-15.32) 30.41,-14.73 33.44,-14.73 33.68,-14.49 v1(34.61,-14.49) ; v1(39.8,-18.97) 39.77,-19 39.77,-22.87 39.55,-23.09 39.55,-25.07 39.73,-25.25 39.73,-26.95 40.16,-27.38 v2(40.16,-27.89)
  B.Cu w0.08: v1(34.61,-14.49) 34.82,-14.7 34.82,-15.68 34.86,-15.72 34.86,-16.49 35.48,-17.11 35.48,-18.28 35.7,-18.5 36.8,-18.5 36.86,-18.44 37.62,-18.44 37.78,-18.28 39.13,-18.28 39.8,-18.95 v1(39.8,-18.97)
  B.Cu w0.2: U74.N13@29.73,-14.61 29.73,-15.23 v1(29.82,-15.32)
ACA2: J10.54 U74.L12 | length 37.9
  In1.Cu w0.08: v3(38.7,-26.05) 39.81,-27.16 v5(42.27,-27.16)
  In8.Cu w0.08: v1(29,-16.53) 29,-15.07 28.56,-14.63 28.56,-13.71 28.98,-13.29 29.45,-13.29 30.42,-12.32 31.45,-12.32 31.57,-12.2 33.84,-12.2 34.09,-12.45 34.09,-13.11 34.27,-13.29 34.97,-13.29 35.59,-12.67 36.56,-12.67 37.17,-13.28 v1(37.91,-13.28) ; v1(40.89,-14.06) 40.92,-14.06 42.71,-15.85 42.71,-22.58 41.66,-23.63 41.66,-24.84 41.71,-24.89 41.71,-26.6 v5(42.27,-27.16)
  B.Cu w0.08: U74.L12@28.46,-17.18 28.46,-16.81 28.74,-16.53 v1(29,-16.53) ; v1(37.91,-13.28) 39.29,-13.28 39.62,-13.61 39.62,-14.17 39.93,-14.48 40.47,-14.48 v1(40.89,-14.06)
ACA3: J10.52 U74.P14 | length 24.9
  F.Cu w0.08: v3(29.32,-19.58) 29.55,-19.35 29.55,-15.33 28.71,-14.49 28.71,-13.85 29.6,-12.96 v3(29.6,-12.45)
  F.Cu w0.2: v3(37.26,-24.77) 37.29,-24.8 J10.52@38.7,-24.8
  In1.Cu w0.08: v3(29.32,-19.58) 29.55,-19.81 33.93,-19.81 35.07,-20.95 35.07,-23.97 35.87,-24.77 v3(37.26,-24.77) ; v3(29.6,-12.45) 29.96,-12.45 30.41,-12.9 31.2,-12.9 31.4,-12.7 v2(31.86,-12.7)
  B.Cu w0.08: U74.P14@31,-13.34 31.1,-13.34 31.74,-12.7 v2(31.86,-12.7)
ACA4: J10.50 U74.M12 | length 28.5
  In1.Cu w0.08: v3(38.7,-23.5) 40.62,-23.5 v4(42.73,-25.61)
  In8.Cu w0.08: v1(29.91,-16.6) 29.91,-16.52 30.27,-16.16 30.57,-16.16 31.64,-15.09 33.59,-15.09 33.67,-15.01 35.84,-15.01 36.12,-15.29 36.85,-15.29 37.76,-16.2 37.76,-18.16 38.36,-18.76 38.36,-22.13 v1(38.38,-22.15) ; v1(41.95,-23.99) 41.95,-25.37 42.19,-25.61 v4(42.73,-25.61)
  B.Cu w0.08: U74.M12@28.46,-15.88 28.92,-15.88 29.64,-16.6 v1(29.91,-16.6) ; v1(38.38,-22.15) 39.52,-23.29 41.25,-23.29 v1(41.95,-23.99)
ACA5: J10.48 U74.R15 | length 28.9
  F.Cu w0.3: J10.48@38.7,-22.25 39.84,-22.25 v2(40.15,-21.94)
  In8.Cu w0.08: v1(32.36,-11.5) 31.99,-11.13 30.74,-11.13 30.59,-11.28 30.59,-11.48 30.44,-11.63 29.84,-11.63 29.48,-11.27 29.48,-10.57 30.33,-9.72 30.9,-9.72 31.22,-9.4 32.17,-9.4 32.37,-9.6 33.48,-9.6 34.04,-10.16 37.58,-10.16 38.45,-11.03 38.45,-12.62 38.61,-12.78 38.61,-14.2 39.46,-15.05 39.46,-16.87 39.28,-17.05 39.28,-21.35 39.23,-21.4 v1(39.23,-21.96)
  B.Cu w0.08: U74.R15@32.27,-12.07 32.27,-11.59 v1(32.36,-11.5) ; v1(39.23,-21.96) 40.13,-21.96 v2(40.15,-21.94)
ACA6: J10.46 U74.T15 | length 32.1
  F.Cu w0.3: J10.46@38.7,-20.95 40.32,-20.95 41.12,-21.75 v2(41.12,-22.01)
  In8.Cu w0.08: v1(34.16,-9.87) 35.52,-9.87 35.62,-9.97 37.7,-9.97 38.65,-10.92 38.65,-12.55 38.81,-12.71 38.81,-14.06 39.65,-14.9 39.65,-16.99 39.47,-17.17 39.47,-21.36 39.58,-21.47 39.58,-22.65 39.28,-22.95 v1(39.28,-25.51) ; v1(40.76,-26.01) 41.04,-26.01 41.15,-25.9 41.15,-25.29 41.05,-25.19 41.05,-22.58 41.11,-22.52 41.11,-22.02 v2(41.12,-22.01)
  B.Cu w0.08: U74.T15@32.27,-10.83 32.27,-10.3 32.82,-9.75 33.49,-9.75 33.61,-9.87 v1(34.16,-9.87) ; v1(39.28,-25.51) 39.34,-25.45 40.39,-25.45 40.76,-25.82 v1(40.76,-26.01)
ACA7: J10.44 U74.M11 | length 15
  F.Cu w0.3: v2(37.11,-19.76) 37.17,-19.7 J10.44@38.7,-19.7
  In8.Cu w0.08: v1(27.29,-16.22) 27.29,-18.18 28.87,-19.76 29.68,-19.76 29.89,-19.97 34.17,-19.97 34.66,-20.46 36.15,-20.46 36.85,-19.76 v2(37.11,-19.76)
  B.Cu w0.08: U74.M11@27.19,-15.91 27.19,-15.88 27.29,-15.98 v1(27.29,-16.22)
ACA8: J10.24 U74.R9 | length 24.7
  F.Cu w0.3: v2(37.33,-6.98) 37.35,-7 J10.24@38.7,-7
  In8.Cu w0.08: v1(25.27,-12.12) 25.27,-10.86 25.85,-10.28 25.85,-9.07 25.74,-8.96 25.74,-7.35 25.87,-7.22 25.87,-3.63 v1(25.85,-3.61) ; v1(29.99,-3.61) 29.99,-5.26 31.15,-6.42 36.77,-6.42 v2(37.33,-6.98)
  B.Cu w0.08: U74.R9@24.65,-12.07 25.22,-12.07 v1(25.27,-12.12) ; v1(25.85,-3.61) v1(29.99,-3.61)
ACA9: J10.22 U74.T9 | length 18.9
  F.Cu w0.3: v2(37.27,-5.71) 37.28,-5.7 J10.22@38.7,-5.7
  In8.Cu w0.08: v1(31.47,-6.1) 31.47,-5.3 31.64,-5.13 37.09,-5.13 37.27,-5.31 v2(37.27,-5.71)
  B.Cu w0.08: U74.T9@24.65,-10.83 24.65,-10.16 25.17,-9.64 25.65,-9.64 26.11,-9.18 26.11,-8.7 27.08,-7.73 27.08,-6.39 27.51,-5.96 30.97,-5.96 31.11,-6.1 v1(31.47,-6.1)
ACA10: J10.16 U74.R7 | length 41.6
  In1.Cu w0.08: v3(38.7,-1.9) 40.87,-1.9 41.38,-1.39 v2(41.38,0.16)
  In8.Cu w0.08: v1(21.46,-11.05) 21.46,-10.75 21.93,-10.28 21.93,-6.01 22.4,-5.54 v1(22.4,1.06) ; v1(35.52,3.41) 35.84,3.09 37.46,3.09 39.79,0.76 41.09,0.76 41.38,0.47 v2(41.38,0.16)
  B.Cu w0.08: v1(21.46,-11.05) 21.46,-11.85 21.68,-12.07 U74.R7@22.11,-12.07 ; v1(22.4,1.06) 22.4,1.46 22.25,1.61 22.25,2.67 23.09,3.51 27.56,3.51 27.87,3.82 35.41,3.82 35.52,3.71 v1(35.52,3.41)
ACA11: J10.20 U74.R8 | length 25
  F.Cu w0.3: J10.20@38.7,-4.45 39.66,-4.45 v5(40.12,-3.99)
  In8.Cu w0.08: v1(25.53,-9.31) v1(25.53,-5.13) ; v1(30.9,-5.1) 31.22,-5.1 31.39,-4.93 36.91,-4.93 v1(37.83,-4.01)
  B.Cu w0.08: U74.R8@23.38,-12.07 24.08,-11.37 24.08,-9.9 24.67,-9.31 v1(25.53,-9.31) ; v1(25.53,-5.13) 26.46,-5.13 26.49,-5.1 v1(30.9,-5.1) ; v1(37.83,-4.01) 40.1,-4.01 v5(40.12,-3.99)
ACA12: J10.42 U74.T14 | length 16.9
  F.Cu w0.3: J10.42@38.7,-18.45 40.15,-18.45 v2(40.17,-18.43)
  In4.Cu w0.08: v2(31.77,-10.2) 32.48,-10.91 33.77,-10.91 34.56,-11.7 37.56,-11.7 37.82,-11.96 37.82,-13.78 39.41,-15.37 39.41,-17.67 v2(40.17,-18.43)
  B.Cu w0.08: U74.T14@31,-10.8 31.5,-10.8 31.77,-10.53 v2(31.77,-10.2)
ACA13: J10.26 U74.P10 | length 19.5
  F.Cu w0.3: v2(37.27,-8.24) 37.28,-8.25 J10.26@38.7,-8.25
  In3.Cu w0.08: v2(25.09,-8.86) 25.16,-8.86 25.54,-9.24 25.93,-9.24 26.2,-9.51 34.87,-9.51 35.53,-8.85 36.66,-8.85 v2(37.27,-8.24)
  In8.Cu w0.08: v2(25.09,-8.86) 25.09,-9.71 24.99,-9.81 24.99,-12.65 v1(25.36,-13.02)
  B.Cu w0.08: v1(25.36,-13.02) 25.45,-13.02 25.75,-13.32 25.9,-13.32 U74.P10@25.92,-13.34
ACA14: J10.28 U74.T11 | length 13.8
  F.Cu w0.3: v2(37.26,-9.53) 37.28,-9.55 J10.28@38.7,-9.55
  In8.Cu w0.08: v1(27.08,-10.74) 28.48,-9.34 29.17,-9.34 29.56,-8.95 v1(29.56,-8.56) ; v1(31.92,-9) 32.13,-9.21 32.34,-9.21 32.5,-9.37 33.71,-9.37 33.84,-9.5 34.24,-9.5 34.36,-9.62 35.09,-9.62 35.66,-9.05 36.78,-9.05 v2(37.26,-9.53)
  B.Cu w0.08: v1(27.08,-10.74) 27.13,-10.74 U74.T11@27.19,-10.8 ; v1(29.56,-8.56) 29.9,-8.9 31.23,-8.9 31.33,-9 v1(31.92,-9)
ACA15: J10.40 U74.P12 | length 26.9
  F.Cu w0.2: J10.40@38.7,-17.15 38.72,-17.17 v2(40.15,-17.17)
  In8.Cu w0.08: v1(27.91,-13.4) 27.24,-14.07 27.24,-15.62 28.46,-16.84 29.12,-16.84 29.33,-16.63 29.33,-15.01 28.81,-14.49 28.81,-13.78 29.1,-13.49 29.73,-13.49 30.13,-13.09 30.76,-13.09 31.12,-13.45 31.12,-13.92 31.55,-14.35 33.29,-14.35 33.46,-14.18 33.46,-13.84 33.62,-13.68 33.99,-13.68 34.08,-13.77 37.34,-13.77 37.55,-13.98 v1(37.55,-14.5)
  B.Cu w0.08: v1(27.91,-13.4) 27.97,-13.34 28.46,-13.34 U74.P12@28.46,-13.37 ; v1(37.55,-14.5) 37.76,-14.29 38.69,-14.29 39.65,-15.25 40.13,-15.25 40.53,-15.65 40.53,-15.91 40.7,-16.08 40.7,-16.94
  B.Cu w0.2: v2(40.15,-17.17) 40.47,-17.17 40.7,-16.94
ACA16: J10.38 U74.R12 | length 35.5
  F.Cu w0.3: J10.38@38.7,-15.9 40.08,-15.9 v5(40.09,-15.89)
  In4.Cu w0.08: v2(27.9,-12.68) 28.6,-11.98 30.1,-11.98 34.65,-16.53 34.65,-21.38 35.71,-22.44 36.2,-22.44 36.41,-22.65 36.41,-22.91 37.49,-23.99 40.77,-23.99 42.34,-22.42 42.34,-15.53 41.99,-15.18 40.28,-15.18 40.09,-15.37 v5(40.09,-15.89)
  B.Cu w0.08: v2(27.9,-12.68) 27.9,-12.65 28.46,-12.09 U74.R12@28.46,-12.07
ACA17: J10.25 U74.T10 | length 18.8
  F.Cu w0.3: J10.25@38.7,-7.65 39.71,-7.65 v5(40.07,-8.01)
  In8.Cu w0.08: v1(32.5,-8.96) 32.5,-8.72 32.81,-8.41 33.64,-8.41 33.75,-8.3 33.75,-7.3 33.85,-7.2 34.75,-7.2 35.3,-7.75 v1(35.92,-7.75)
  B.Cu w0.08: U74.T10@25.92,-10.8 25.92,-10.2 26.86,-9.26 28.98,-9.26 29.14,-9.1 31.08,-9.1 31.3,-9.32 32.14,-9.32 v1(32.5,-8.96) ; v1(35.92,-7.75) 38.56,-7.75 38.82,-8.01 v5(40.07,-8.01)
ACA18: J10.27 U74.R10 | length 21.6
  F.Cu w0.3: J10.27@38.7,-8.9 40.05,-8.9 v4(40.06,-8.89)
  In8.Cu w0.08: v1(26.36,-11.43) 26.36,-10.76 26.49,-10.63 26.49,-10.3 27.39,-9.4 28.09,-9.4 28.35,-9.14 29.02,-9.14 29.18,-8.98 29.18,-6.68 v1(29.47,-6.39) ; v1(39.04,-6.7) 39.04,-7.87 v4(40.06,-8.89)
  B.Cu w0.08: U74.R10@25.92,-12.07 25.92,-11.88 26.36,-11.44 v1(26.36,-11.43) ; v1(29.47,-6.39) 31.88,-6.39 32.01,-6.52 38.48,-6.52 38.67,-6.71 39.03,-6.71 v1(39.04,-6.7)
ACA19: J10.29 U74.P11 | length 18.8
  F.Cu w0.3: J10.29@38.7,-10.2 39.89,-10.2 40.07,-10.38 v4(40.07,-10.75)
  In8.Cu w0.08: v1(27.27,-13.21) 27.27,-11.98 v1(27.96,-11.29)
  B.Cu w0.08: U74.P11@27.19,-13.37 27.27,-13.29 v1(27.27,-13.21) 27.27,-13.26 U74.P11@27.19,-13.34 ; v1(27.96,-11.29) 27.96,-10.61 28.36,-10.21 29.19,-10.21 29.44,-9.96 31,-9.96 31.16,-9.8 32.53,-9.8 32.78,-9.55 33.43,-9.55 33.96,-9.02 35.02,-9.02 35.35,-9.35 35.35,-9.84 35.52,-10.01 35.57,-10.01 35.58,-10 39.32,-10 v4(40.07,-10.75)
ACA20: J10.31 U74.T12 | length 17.7
  F.Cu w0.3: J10.31@38.7,-11.45 40.14,-11.45 40.9,-12.21 v5(41.49,-12.21)
  In8.Cu w0.08: v1(31.21,-10.17) 31.61,-9.77 31.94,-9.77 32.31,-10.14 32.31,-10.42 32.63,-10.74 34.63,-10.74 34.76,-10.87 v1(35.1,-10.87)
  B.Cu w0.08: U74.T12@28.46,-10.8 28.71,-10.55 29.11,-10.55 29.49,-10.17 v1(31.21,-10.17) ; v1(35.1,-10.87) 35.16,-10.87 35.58,-11.29 39.32,-11.29 40.24,-12.21 v5(41.49,-12.21)
ACA21: J10.33 U74.N10 | length 23.9
  F.Cu w0.3: J10.33@38.7,-12.7 39.99,-12.7 v5(40.08,-12.79)
  In8.Cu w0.08: v1(26.16,-14.84) 26.16,-12.07 26.71,-11.52 26.71,-10.64 v1(27.25,-10.1) ; v1(38.1,-9.04) 38.1,-9.86 38.89,-10.65 38.89,-12.37 v1(38.93,-12.41)
  B.Cu w0.08: U74.N10@25.92,-14.64 26.12,-14.84 v1(26.16,-14.84) 26.15,-14.84 U74.N10@25.92,-14.61 ; v1(27.25,-10.1) 27.43,-9.92 28.53,-9.92 28.62,-10.01 29.1,-10.01 29.37,-9.74 30.87,-9.74 30.99,-9.62 32.34,-9.62 32.59,-9.37 33.26,-9.37 33.83,-8.8 35.21,-8.8 35.33,-8.92 37.53,-8.92 37.65,-9.04 v1(38.1,-9.04) ; v1(38.93,-12.41) 39.7,-12.41 v5(40.08,-12.79)
ACA22: J10.39 U74.T13 | length 17.2
  F.Cu w0.3: J10.39@38.7,-16.55 40.2,-16.55 v2(40.21,-16.54)
  In8.Cu w0.08: v1(30.01,-10.84) 30.01,-10.66 30.45,-10.22 30.79,-10.22 31.29,-10.72 32.22,-10.72 32.42,-10.92 34.37,-10.92 34.63,-11.18 35.62,-11.18 35.7,-11.26 36.79,-11.26 36.98,-11.45 37.59,-11.45 38.07,-11.93 38.07,-12.86 38.26,-13.05 38.26,-14.67 38.94,-15.35 v1(38.94,-16.52)
  B.Cu w0.08: U74.T13@29.73,-10.83 U74.T13@29.74,-10.84 ; U74.T13@29.73,-10.8 29.77,-10.84 v1(30.01,-10.84) ; v1(38.94,-16.52) 40.19,-16.52 v2(40.21,-16.54)
ACA23: J10.41 U74.R13 | length 16.7
  F.Cu w0.3: v2(37.29,-17.82) 37.31,-17.8 J10.41@38.7,-17.8
  In4.Cu w0.08: v2(36.58,-12.27) 36.58,-12.31 35.95,-12.94 35.79,-12.94 35.5,-13.23 35.5,-17.46 35.73,-17.69 36.55,-17.69 36.68,-17.82 v2(37.29,-17.82)
  In8.Cu w0.08: v1(30.01,-12.13) 31.28,-12.13 31.43,-11.98 35.065,-11.98 35.425,-11.62 36.38,-11.62 36.58,-11.82 v2(36.58,-12.27)
  B.Cu w0.08: U74.R13@29.73,-12.07 29.79,-12.13 v1(30.01,-12.13)
ACA24: J10.43 U74.P13 | length 16.2
  F.Cu w0.3: v2(37.3,-18.89) 37.51,-19.1 J10.43@38.7,-19.1
  In8.Cu w0.08: v1(29.96,-14.04) 29.96,-14.37 30.13,-14.54 33.37,-14.54 33.6,-14.31 34.18,-14.31 34.35,-14.14 36.73,-14.14 37.01,-14.42 37.01,-14.82 38.39,-16.2 38.39,-16.95 38.57,-17.13 v1(38.57,-18.57)
  B.Cu w0.08: U74.P13@29.73,-13.34 29.96,-13.57 v1(29.96,-14.04) ; v2(37.3,-18.89) 38.25,-18.89 v1(38.57,-18.57)
ACA25: J10.45 U74.R14 | length 24.1
  F.Cu w0.3: v2(37.11,-20.46) 37.22,-20.35 J10.45@38.7,-20.35
  In6.Cu w0.08: v2(33.02,-13.93) 32.33,-14.62 32.33,-16.93 32.62,-17.22 33.96,-17.22 34.31,-17.57 34.31,-22.86 35.47,-24.02 37.17,-24.02 38.04,-23.15 38.04,-20.85 37.65,-20.46 v2(37.11,-20.46)
  In8.Cu w0.08: v1(30.87,-12.65) 31.03,-12.65 31.56,-13.18 31.56,-13.73 31.76,-13.93 v2(33.02,-13.93)
  B.Cu w0.08: v1(30.87,-12.65) 30.87,-12.2 31,-12.07 U74.R14@31,-12.1
ACD0: J10.60 U74.N16 | length 21.1
  F.Cu w0.3: v2(37.31,-29.85) J10.60@38.7,-29.85
  In6.Cu w0.08: v2(36.58,-16.93) 37,-17.35 37.82,-17.35 38.1,-17.63 38.1,-20.09 38.41,-20.4 38.41,-23.53 37.89,-24.05 37.89,-29.59 37.9,-29.6 37.9,-29.64 37.69,-29.85 v2(37.31,-29.85)
  In8.Cu w0.08: v1(33.8,-15.32) 34.08,-15.32 34.21,-15.19 35.69,-15.19 36.11,-15.61 36.11,-15.95 36.58,-16.42 v2(36.58,-16.93)
  B.Cu w0.4: U74.N16@33.54,-14.61 33.54,-15.06 v1(33.8,-15.32)
ACD1: J10.62 U74.N15 | length 33.7
  F.Cu w0.3: v2(37.39,-30.88) 37.61,-31.1 J10.62@38.7,-31.1
  In4.Cu w0.08: v2(31.68,-19.13) 31.18,-18.63 30.06,-18.63 28.73,-19.96 28.73,-23.64 29.75,-24.66 37.28,-24.66 37.76,-25.14 37.76,-27.31 37.07,-28 35.93,-28 35.24,-28.69 35.24,-29.77 36.35,-30.88 v2(37.39,-30.88)
  In8.Cu w0.08: v2(31.68,-19.13) 31.68,-18.51 31.22,-18.05 31.22,-15.92 31.68,-15.46 v1(32.86,-15.46)
  B.Cu w0.08: U74.N15@32.27,-14.61 32.86,-15.2 v1(32.86,-15.46)
ACD1#: J10.5 R117.2 U74.T4 | length 46.3
  F.Cu w0.08: v3(12.51,-7.31) 12.62,-7.42 R117.2@12.62,-9.04
  F.Cu w0.3: v2(37.25,5.06) 37.29,5.1 J10.5@38.7,5.1
  In1.Cu w0.08: v3(12.51,-7.31) 12.51,-6.94 12.34,-6.77 12.34,-5.75 12.53,-5.56 17.62,-5.56 18.72,-6.66 v2(18.72,-8.27)
  In8.Cu w0.08: v1(18.34,-10.65) 18.34,-10.06 18.28,-10 18.28,-9.17 18.72,-8.73 v2(18.72,-8.27) 18.72,-6.55 18.97,-6.3 18.97,-4.46 19.16,-4.27 19.16,-2.38 19.27,-2.27 19.27,-1.46 18.97,-1.16 18.97,0.8 20.01,1.84 v1(20.01,1.85)
  B.Cu w0.08: U74.T4@18.3,-10.8 18.34,-10.76 v1(18.34,-10.65) U74.T4@18.34,-10.79 ; v1(20.01,1.85) 20.99,2.83 21.53,2.83 22.61,3.91 26.08,3.91 26.48,4.31 29.75,4.31 30.07,4.63 31.38,4.63 32.24,5.49 35.43,5.49 35.67,5.73 36.58,5.73 v2(37.25,5.06)
ACD2: J10.64 U74.M16 | length 24.7
  F.Cu w0.3: v2(37.33,-32.77) 37.7,-32.4 J10.64@38.7,-32.4
  In8.Cu w0.08: v1(34.37,-17.09) 33.97,-17.49 33.97,-17.73 34.22,-17.98 34.96,-17.98 35.5,-18.52 36.35,-18.52 36.59,-18.28 37.64,-18.28 38.14,-18.78 38.14,-21.81 38.1,-21.85 38.1,-24.88 38.28,-25.06 38.28,-27.04 v1(37.75,-27.57)
  B.Cu w0.08: U74.M16@33.54,-15.88 33.95,-15.88 34.37,-16.3 v1(34.37,-17.09) ; v2(37.33,-32.77) 37.33,-31.44 36.84,-30.95 36.48,-30.95 36.2,-30.67 36.2,-30.24 37.21,-29.23 37.55,-29.23 37.75,-29.03 v1(37.75,-27.57)
ACD2#: J10.67 R177.2 U74.L16 | length 87.1
  F.Cu w0.08: R177.2@32.14,-27.57 32.14,-29.88 32.36,-30.1 v3(32.36,-32.25) ; v2(36.63,-33.9) 37.03,-34.3 J10.67@38.7,-34.3 40,-34.3 40.61,-34.91 v3(40.61,-36.81)
  In1.Cu w0.08: v3(32.36,-32.25) 33.74,-32.25 34.57,-33.08 36.32,-33.08 36.63,-33.39 v2(36.63,-33.9) ; v3(40.61,-36.81) 40.59,-36.83 40.59,-41.69 40.46,-41.82 40.46,-42.47 40.71,-42.72 41.72,-42.72 42.2,-43.2 46.77,-43.2 47.35,-42.62 47.35,-41.67 v2(46.63,-40.95)
  In8.Cu w0.08: v1(34.04,-16.52) 34.31,-16.25 34.64,-16.25 34.95,-15.94 35.81,-15.94 v1(35.83,-15.96) ; v1(45.51,-34.43) 45.51,-39.83 v2(46.63,-40.95) ; v1(47.87,-16.55) 47.87,-17.19 47.95,-17.27 47.95,-18.225 49.325,-19.6 49.325,-20.65 48.44,-21.535 48.44,-23.05 48.61,-23.22 52.1,-23.22 52.41,-23.53 v1(52.41,-28.19)
  B.Cu w0.08: U74.L16@33.54,-17.18 33.54,-17.07 34.04,-16.57 v1(34.04,-16.52) ; v1(35.83,-15.96) 36.03,-15.76 36.03,-14.38 36.31,-14.1 38.93,-14.1 39.74,-14.91 41.52,-14.91 41.88,-14.55 44.88,-14.55 45.11,-14.78 46.1,-14.78 v1(47.87,-16.55) ; v1(45.51,-34.43) 50.25,-34.43 51,-33.68 51.63,-33.68 51.87,-33.44 51.87,-33.03 51.51,-32.67 50.75,-32.67 50.49,-32.41 50.49,-31.58 50.8,-31.27 51.33,-31.27 52.89,-29.71 52.89,-28.67 v1(52.41,-28.19)
ACD3: J10.4 U74.N5 | length 42
  F.Cu w0.3: J10.4@38.7,5.7 v2(40.08,5.7)
  In4.Cu w0.08: v2(26.28,-1.06) 25.7,-1.06 25.24,-0.6 24.42,-0.6 24.06,-0.24 24.06,0.17 26.73,2.84 29.08,2.84 29.77,3.53 34.74,3.53 35.55,4.34 38.72,4.34 v2(40.08,5.7)
  In8.Cu w0.08: v1(20.31,-12.95) v1(20.31,-9.51) ; v1(26.06,-8.28) 26.06,-7.55 26.19,-7.42 26.19,-2.54 26.77,-1.96 26.77,-1.55 v2(26.28,-1.06)
  B.Cu w0.08: U74.N5@19.57,-14.61 20.31,-13.87 v1(20.31,-12.95) ; v1(20.31,-9.51) 23.25,-9.51 24.48,-8.28 v1(26.06,-8.28)
ACD4: J10.6 U74.M7 | length 39.9
  F.Cu w0.3: v2(36.22,5.12) 36.89,4.45 J10.6@38.7,4.45
  In8.Cu w0.08: v1(22.19,-15.3) 20.74,-13.85 20.74,-12.44 21.02,-12.16 22.02,-12.16 22.49,-11.69 22.49,-9.4 22.32,-9.23 22.32,-6.42 22.82,-5.92 22.82,-1.06 23.32,-0.56 25.43,-0.56 25.91,-0.08 25.91,1.33 25.71,1.53 v1(25.71,2.71) ; v1(30.42,4.31) 30.42,3.54 30.78,3.18 30.78,2.84 30.43,2.49 v1(30.43,2.25)
  B.Cu w0.08: U74.M7@22.11,-15.88 22.11,-15.38 v1(22.19,-15.3) ; v1(25.71,2.71) 26.11,3.11 28.14,3.11 28.75,2.5 30.18,2.5 v1(30.43,2.25) ; v1(30.42,4.31) 32.12,4.31 32.52,4.71 34.23,4.71 34.64,5.12 v2(36.22,5.12)
ACD5: J10.8 U74.P5 | length 51.7
  F.Cu w0.3: J10.8@38.7,3.2 39.93,3.2 40.17,2.96 v2(40.17,2.57)
  In8.Cu w0.08: v1(19.17,-12.94) 19.17,-4.67 19.35,-4.49 19.35,-2.53 19.47,-2.41 19.47,-1.36 19.18,-1.07 19.18,0.24 19.42,0.48 19.94,0.48 20.88,1.42 20.88,2.61 21.28,3.01 21.28,5.54 21.1,5.72 21.1,7.83 v1(22.69,9.42) ; v1(24.02,9.44) 24.67,10.09 32.52,10.09 33.59,11.16 36.45,11.16 37.81,9.8 37.81,6.7 39.12,5.39 39.12,3.62 v2(40.17,2.57)
  B.Cu w0.08: v1(19.17,-12.94) 19.57,-13.34 U74.P5@19.57,-13.37 ; v1(22.69,9.42) 22.7,9.43 24.01,9.43 v1(24.02,9.44)
ACD6: J10.10 U74.R5 | length 41.1
  F.Cu w0.3: v2(37.24,1.89) 37.3,1.95 J10.10@38.7,1.95
  In8.Cu w0.08: v1(20.64,-10.21) 20.64,-9.89 21.5,-9.03 21.5,-5.34 21.34,-5.18 21.34,-3.7 21.69,-3.35 21.69,5.42 23.64,7.37 v1(25.42,7.37) ; v1(30.68,4.94) 32.3,4.94 32.57,4.67 33.18,4.67 33.64,4.21 33.64,2.69 34.09,2.24 34.89,2.24 35.45,1.68 v1(36.29,1.68)
  B.Cu w0.08: U74.R5@19.57,-12.07 20.27,-11.37 20.27,-10.46 20.52,-10.21 v1(20.64,-10.21) ; v1(25.42,7.37) 25.42,5.49 26.29,4.62 29.39,4.62 29.71,4.94 v1(30.68,4.94) ; v1(36.29,1.68) 36.56,1.68 36.77,1.89 v2(37.24,1.89)
ACD7: J10.12 U74.T6 | length 43.9
  In1.Cu w0.08: v3(38.7,0.65) 38.74,0.61 39.73,0.61 39.85,0.73 40.93,0.73 v2(41.45,1.25)
  In8.Cu w0.08: v1(20.89,-10.65) 21.1,-10.44 21.1,-9.83 21.74,-9.19 21.74,-5.79 22.21,-5.32 22.21,-1.42 21.91,-1.12 21.91,5.21 23.37,6.67 27.62,6.67 27.84,6.89 35.01,6.89 35.93,5.97 37.82,5.97 38.59,5.2 38.59,2.67 39.3,1.96 40.74,1.96 v2(41.45,1.25)
  B.Cu w0.08: U74.T6@20.84,-10.8 20.89,-10.75 v1(20.89,-10.65) U74.T6@20.89,-10.78
ACD8: J10.61 U74.K13 | length 27.2
  F.Cu w0.3: J10.61@38.7,-30.45 40.13,-30.45 v2(40.17,-30.49)
  In8.Cu w0.08: v1(29.84,-19.14) 30.27,-19.57 34.46,-19.57 34.55,-19.66 35.53,-19.66 35.78,-19.41 36.13,-19.41 37.08,-18.46 37.49,-18.46 37.95,-18.92 37.95,-21.55 37.87,-21.63 37.87,-24.99 37.96,-25.08 37.96,-26.93 37.42,-27.47 37.22,-27.47 36.98,-27.71 36.98,-28.01 37.18,-28.21 37.99,-28.21 38.91,-27.29 39.2,-27.29 39.62,-27.71 39.62,-29.94 v2(40.17,-30.49)
  B.Cu w0.08: U74.K13@29.73,-18.42 29.73,-19.03 v1(29.84,-19.14)
ACD9: J10.63 U74.M14 | length 71.4
  F.Cu w0.3: J10.63@38.7,-31.75 40.17,-31.75 v2(40.18,-31.76)
  In8.Cu w0.08: v1(31.62,-16.1) 33.29,-16.1 33.59,-15.8 34.09,-15.8 v1(34.41,-15.48) ; v1(34.39,-12.27) 34.39,-12.95 v1(34.41,-12.97) ; v2(40.18,-31.76) 40.18,-32.92 39.71,-33.39 39.71,-35.53 39.96,-35.78 40.82,-35.78 41.21,-35.39 v1(42.98,-35.39) ; v1(41.76,-13.33) 42.64,-13.33 43.15,-12.82 43.59,-12.82 43.91,-13.14 43.91,-13.71 45.65,-15.45 v1(45.65,-17.57) ; v1(47.39,-39.27) 47.39,-35.81 48.125,-35.075 51.545,-35.075 51.98,-34.64 51.98,-34.18 51.65,-33.85 51.1,-33.85 50.8,-33.55 50.8,-32.725 50.33,-32.255 50.33,-31.15 49.68,-30.5 49.68,-29.86 50.08,-29.46 50.08,-26.62 49.66,-26.2 48.46,-26.2 47.84,-25.58 47.84,-20.98 47.47,-20.61 47.47,-19.67 47.62,-19.52 v1(47.62,-17.57)
  B.Cu w0.08: U74.M14@31,-15.88 31.4,-15.88 v1(31.62,-16.1) ; v1(34.39,-12.27) 34.39,-11.7 34.69,-11.4 35.15,-11.4 35.28,-11.53 37.47,-11.53 38.98,-13.04 39.52,-13.04 39.81,-13.33 v1(41.76,-13.33) ; v1(34.41,-15.48) 34.41,-14.97 34.29,-14.85 34.29,-14.25 34.41,-14.13 v1(34.41,-12.97) ; v1(42.98,-35.39) 42.98,-38.53 43.8,-39.35 46.82,-39.35 46.9,-39.27 v1(47.39,-39.27) ; v1(45.65,-17.57) v1(47.62,-17.57)
ACD10: J10.65 U74.M15 | length 26.9
  F.Cu w0.3: J10.65@38.7,-33 40.6,-33 40.87,-33.27 v2(41.19,-33.27)
  In8.Cu w0.08: v1(32.37,-16.58) 32.37,-16.96 32.56,-17.15 32.56,-18.09 32.8,-18.33 v1(34.73,-18.33) ; v1(38.96,-23.61) 38.98,-23.63 38.98,-26.56 39.8,-27.38 39.8,-29.59 40.16,-29.95 40.41,-29.95 40.64,-30.18 40.64,-32.72 v2(41.19,-33.27)
  B.Cu w0.08: U74.M15@32.27,-15.88 32.27,-16.48 v1(32.37,-16.58) ; v1(34.73,-18.33) 34.73,-18.62 34.76,-18.65 34.76,-20.81 34.65,-20.92 34.65,-22.17 34.95,-22.47 36.36,-22.47 36.75,-22.86 36.75,-23.09 37.27,-23.61 v1(38.96,-23.61)
ACD11: J10.7 U74.R4 | length 39.5
  F.Cu w0.3: J10.7@38.7,3.8 40.05,3.8 v2(40.18,3.93)
  In8.Cu w0.08: v1(19.98,-8.6) 19.98,-8.25 20.43,-7.8 20.43,-7.34 20.23,-7.14 20.23,-4.58 20.67,-4.14 20.67,-3.14 20.31,-2.78 20.31,-0.12 v1(21.1,0.67) ; v1(34.95,4.1) 34.95,4.99 35.53,5.57 37.62,5.57 37.94,5.25 v1(37.94,4.87)
  B.Cu w0.08: U74.R4@18.305,-12.09 18.99,-11.405 18.99,-10.3 19.59,-9.7 19.59,-8.99 v1(19.98,-8.6) ; v1(21.1,0.67) 21.97,1.54 21.97,2.88 22.82,3.73 26.93,3.73 27.19,3.99 34.44,3.99 34.55,4.1 v1(34.95,4.1) ; v1(37.94,4.87) 39.52,4.87 39.86,4.53 40.07,4.53 40.11,4.49 40.11,4 v2(40.18,3.93)
ACD12: J10.9 U74.T5 | length 38.4